# Altium PCB terminate-logic.PcbDoc
Units mil, origin at the board's own origin, x right, y up, seen from the top; angles counter-clockwise.
Board outline 650 x 1325 mil, 2 copper layers (Top Layer, Bottom Layer), stack 47.8 mil thick; 9 components, 5 nets, 36 pads, 0 vias.
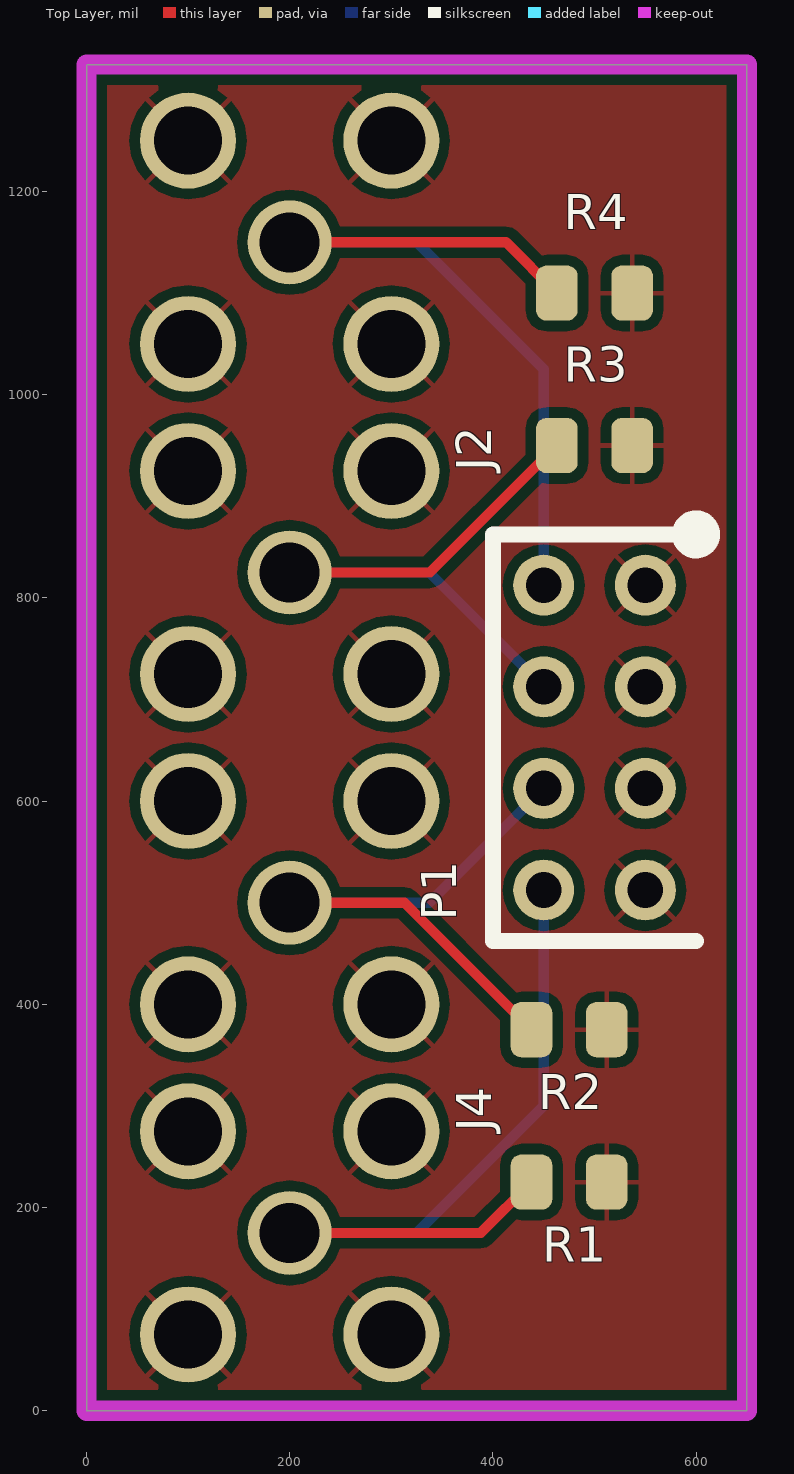
[diagram p0: Top Layer view]
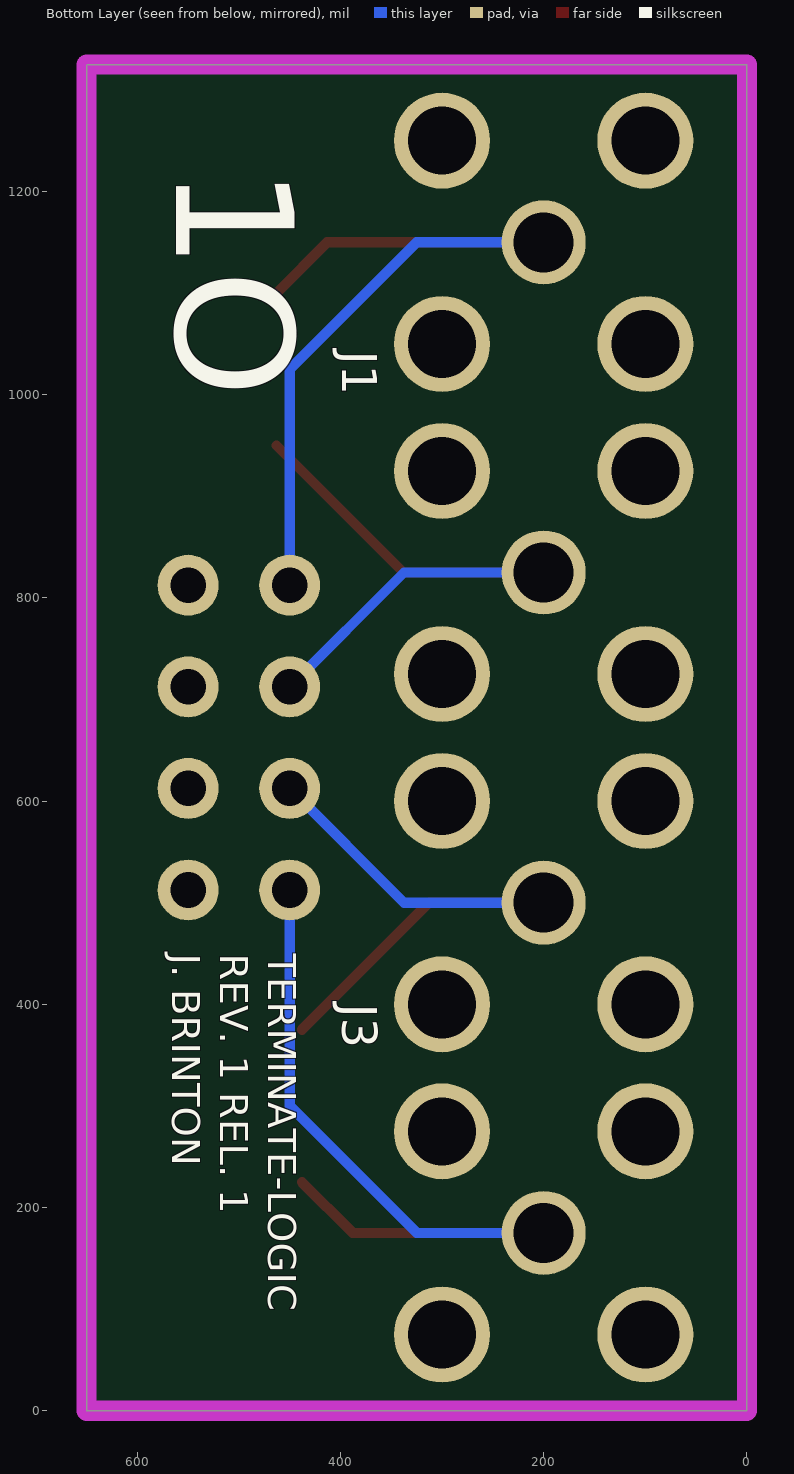
[diagram p1: Bottom Layer view, seen from below]
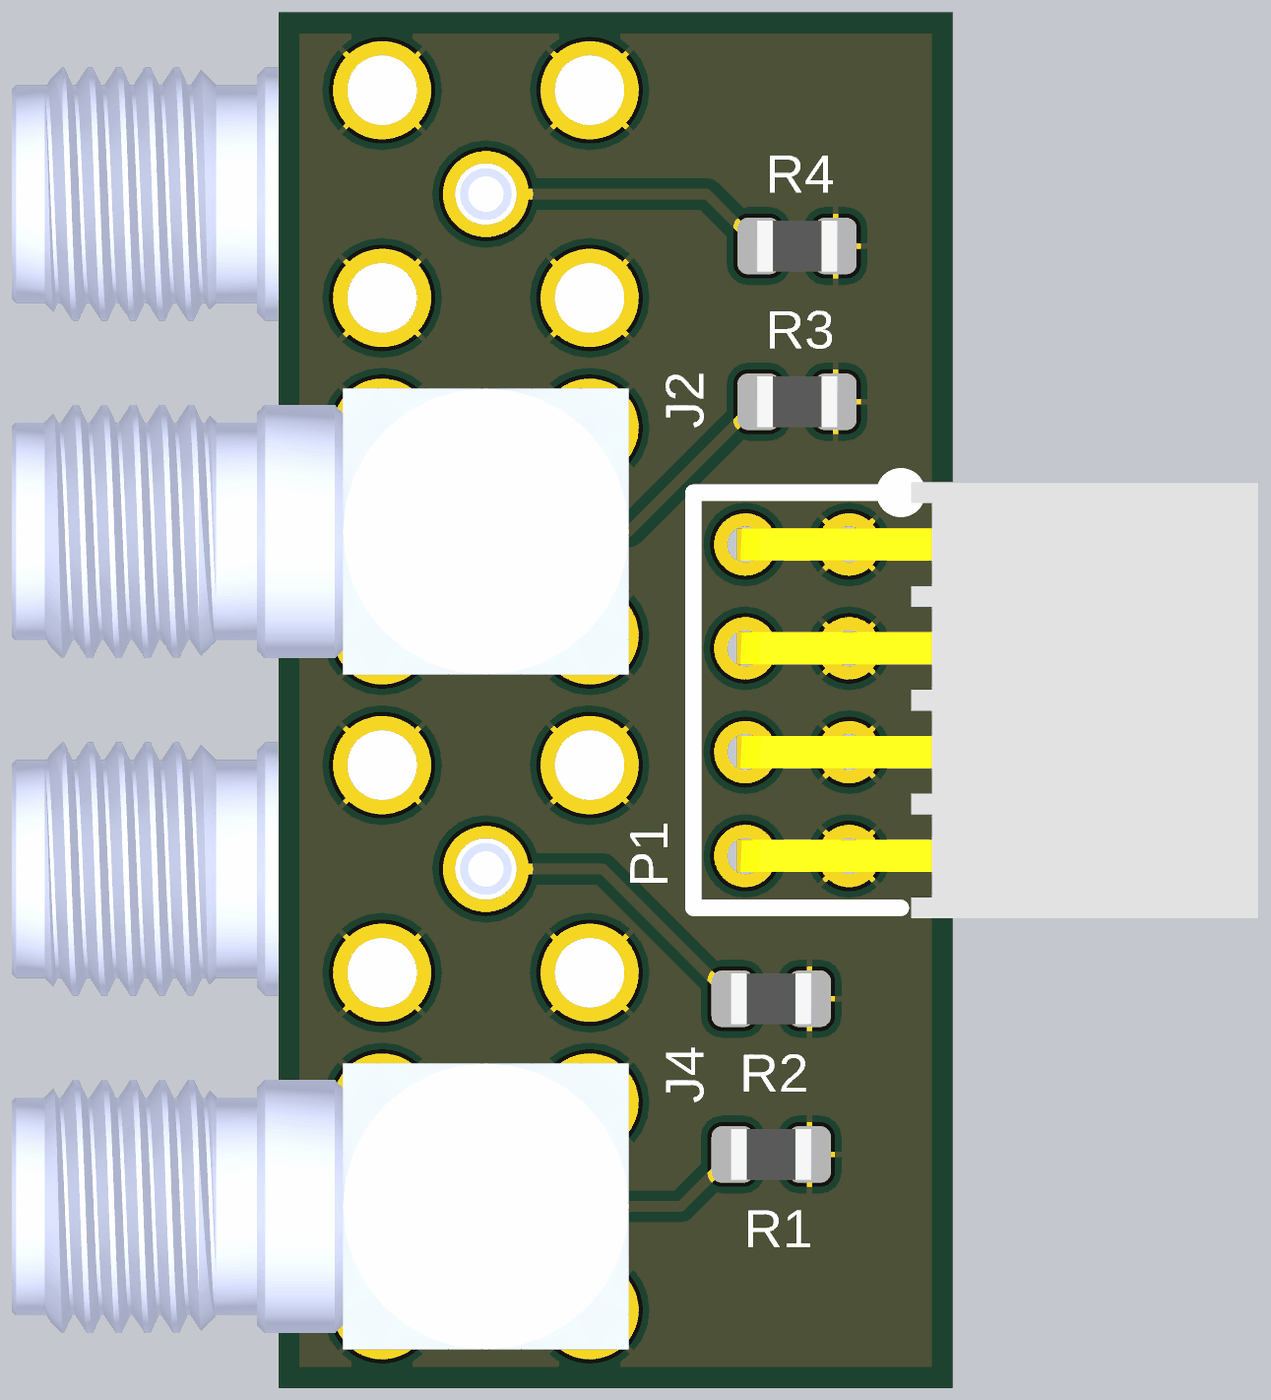
[diagram p2: 3D render of the assembled board from above, using the file's embedded part models]

## Layer stack, top to bottom
Top Solder: solder mask 0.4, Solder Resist, Dk 3.5
Top Layer: signal copper 1.4
Dielectric1: core 45, FR-4, Dk 4.8
Bottom Layer: signal copper 1.4
Bottom Solder: solder mask 0.4, Solder Resist, Dk 3.5

## Board outline
0,0 650,0 650,1325 0,1325

## Design rules (kind name [scope] priority, off if disabled: settings)
Clearance [All] p1: gap=10 ignorepadtopadclearanceinfootprint=FALSE
ComponentClearance [All] p1 off: gap=10 collisioncheckmode=3 verticalgap=10 showdistances=FALSE
HoleSize [All] p1: absolutevalues=TRUE maxlimit=1000 minlimit=10 maxpercent=80.000 minpercent=20.000
PolygonConnect [All] p1: thpad.connectstyle=Relief thpad.reliefconductorwidth=5 thpad.reliefentries=4 thpad.polygonreliefangle="45 Angle" thpad.airgapwidth=10 smdpad.connectstyle=Relief smdpad.reliefconductorwidth=5 smdpad.reliefentries=4 smdpad.polygonreliefangle="90 Angle" smdpad.airgapwidth=10 via.connectstyle=Direct via.reliefconductorwidth=10 via.reliefentries=4 via.polygonreliefangle="90 Angle" via.airgapwidth=10
RoutingVias [All] p1: holewidth=28 width=50 viastyle="Through Hole" minholewidth=28 minwidth=50 maxholewidth=28 maxwidth=50
SilkToSolderMaskClearance SilkscreenOverComponentPads [IsPad] p1: minsilkscreentomaskgap=10 clearancetoexposedcopper=TRUE
SolderMaskExpansion [All] p1: expansion=4
Width [All] p1: maxlimit=19685.04 minlimit=10 preferedwidth=10
27 further rules are at their usual default settings.

## Components (designator, comment, footprint, x,y, rotation, side; value= is the part's Value field where it differs from the comment)
J1 "132136" 132136 200,1150 r0 bottom
J2 "132136" 132136 200,825 r0 top
J3 "132136" 132136 200,500 r0 bottom
J4 "132136" 132136 200,175 r0 top
P1 "SSW-104-02-T-D-RA" SSW-104-02-T-D-RA 500,662.5 r270 top
R1 "ERJ-6ENF49R9V" RESC2012X70N 475,225 r0 top value=49.9
R2 "ERJ-6ENF49R9V" RESC2012X70N 475,375 r0 top value=49.9
R3 "ERJ-6ENF49R9V" RESC2012X70N 500,950 r0 top value=49.9
R4 "ERJ-6ENF49R9V" RESC2012X70N 500,1100 r0 top value=49.9

## Footprints (in the part's own frame and the unit in brackets; to place one, negate y for a bottom-side part, rotate by r counter-clockwise, add the part's x,y. Pads: shape width x height; smd on the part's side, far side on the other; paste and mask are expansions set on the pad)
132136 [mm] "SMA R/A Connector"
  round 2.1 hole 1.5: 1(0,0)
  round 2.4 hole 1.7: 2(2.54,-2.54) 3(2.54,2.54) 4(-2.54,2.54) 5(-2.54,-2.54)
  body extent -11.6,-3.5 3.5,3.5, height 9.86
RESC2012X70N [mm] "Resistor, Chip; 2.00 mm L X 1.25 mm W X 0.70 mm H body"
  rrect50% 1.04x1.38 smd: 1(-0.94,0) 2(0.94,0)
  body extent -1,-0.63 1,0.63, height 0.7
SSW-104-02-T-D-RA [mil] "Through Hole Right Angle 0.1\"-Pitch Header Receptacle"
  round 60 hole 35: 1(-150,50) 2(-150,-50) 3(-50,50) 4(-50,-50) 5(50,50) 6(50,-50) 7(150,50) 8(150,-50)
  silkscreen extent -212,-100 200,112, body extent -210,-58 210,445, height 195

## Part data
J1 J2 J3 J4: "SMA Right Angle Connector COAX Female", Manufacturer=Amphenol, Manufacturer P/N=132136
P1: "Through Hole Right Angle 0.1\"-Pitch Header Receptacle", Manufacturer=Samtec, Manufacturer P/N=SSW-104-02-T-D-RA
R1 R2 R3 R4: library part "RES 0402", "Thick Film Resistor 49.9 ±1% 0805", Manufacturer=Panasonic, Package=0805, Tolerance=±1%, Alternate="any same value component", Manufacturer P/N=ERJ-6ENF49R9V, Tr=-55:155

## Nets (pads, with @x,y where several pads share a name; then routed paths per layer and width w, separated by ;. In a path a pad name is that pad's centre, name@x,y a point inside that pad or via, vN(x,y) a via of type N, cw(c..) or ccw(c..) an arc to the next point about the centre after c; other vN are vias at no path point)
GND: J1.2 J1.3 J1.4 J1.5 J2.2 J2.3 J2.4 J2.5 J3.2 J3.3 J3.4 J3.5 J4.2 J4.3 J4.4 J4.5 P1.1 P1.3 P1.5 P1.7 R1.2 R2.2 R3.2 R4.2
NetJ1_1: J1.1 P1.2 R4.1 | length 798
  Top Layer w10: J1.1 412.99,1150 R4.1
  Bottom Layer w10: J1.1 325,1150 450,1025 P1.2
NetJ2_1: J2.1 P1.4 R3.1 | length 611.4
  Top Layer w10: J2.1 337.99,825 R3.1
  Bottom Layer w10: J2.1 337.5,825 P1.4
NetJ3_1: J3.1 P1.6 R2.1 | length 586.4
  Top Layer w10: J3.1 312.99,500 R2.1
  Bottom Layer w10: J3.1 337.5,500 P1.6
NetJ4_1: J4.1 P1.8 R1.1 | length 773
  Top Layer w10: J4.1 387.99,175 R1.1
  Bottom Layer w10: J4.1 325,175 450,300 P1.8

## Polygon pours and split planes (outlines as drawn)
GND on Top Layer "TOP_GND" (solid, pour order 0): 0,0 650,0 650,1325 0,1325

## Keep-outs
Keep-Out Layer:
  the board outline again, w20

## Silkscreen, mask and mechanical layers (free items; w line width, h text height)
Bottom Overlay:
  text "1O" at 600,1225 h200 r90
  text "TERMINATE-LOGIC / REV. 1 REL. 1 / J. BRINTON" at 575,450 h47.24 r90
Mechanical 2:
  the board outline again, w5
Mechanical 10:
  text "1. FRONT ASSEMBLY NOTE #1" at 2075,5300 h45
Mechanical 11:
  text "1. FRONT CONFORMAL COAT NOTE #1" at 2075,5225 h45
Mechanical 16:
  lines w5: -2283.46,-119.09 -2083.46,-119.09 ; -2283.46,2005.91 -2083.46,2005.91 ; -2283.46,4130.91 -2083.46,4130.91 ; 466.54,-2244.09 466.54,-2044.09 ; 466.54,6055.91 466.54,6255.91 ; 1216.54,-2044.09 1216.54,-844.09 2616.54,-844.09 ; 1216.54,-1204.09 2616.54,-1204.09 ; 1266.54,-1334.09 1666.54,-1334.09 ; 1481.54,-1614.09 1511.54,-1614.09 ; 1481.54,-1589.09 1511.54,-1589.09 ; 1481.54,-1514.09 1511.54,-1514.09 ; 1481.54,-1489.09 1511.54,-1489.09 ; 1481.54,-1414.09 1511.54,-1414.09 ; 1481.54,-1389.09 1511.54,-1389.09 ; 3216.54,-2244.09 3216.54,-2044.09 ; 3216.54,6055.91 3216.54,6255.91 ; 4016.54,-1744.09 8516.54,-1744.09 ; 4016.54,-1444.09 8516.54,-1444.09 ; 4016.54,-1144.09 5516.54,-1144.09 ; 4016.54,5655.91 8516.54,5655.91 ; 4016.54,5855.91 8516.54,5855.91 ; 4016.54,6055.91 4016.54,5455.91 8516.54,5455.91 ; 4616.54,5455.91 4616.54,6055.91 ; 5116.54,5455.91 5116.54,6055.91 ; 5516.54,-2044.09 5516.54,-1444.09 5516.54,-844.09 ; 5966.54,-2244.09 5966.54,-2044.09 ; 5966.54,6055.91 5966.54,6255.91 ; 7616.54,-2044.09 7616.54,-1444.09 ; 7891.54,5455.91 7891.54,6055.91 ; 8516.54,-119.09 8716.54,-119.09 ; 8516.54,2005.91 8716.54,2005.91 ; 8516.54,4130.91 8716.54,4130.91 ; 2616.54,-844.09 4016.54,-844.09 ; 2616.54,-844.09 2616.54,-2044.09 4016.54,-2044.09 ; 4016.54,-2044.09 8516.54,-2044.09 ; 4016.54,-2044.09 4016.54,-844.09 ; 4016.54,-844.09 5516.54,-844.09 ; 5516.54,-844.09 8516.54,-844.09 8516.54,-2044.09 ; 8516.54,-2044.09 -2083.46,-2044.09 -2083.46,6055.91 8516.54,6055.91 8516.54,-2044.09 ; -2283.46,-2244.09 8716.54,-2244.09 8716.54,6255.91 -2283.46,6255.91 -2283.46,-2244.09
  lines w7: 1496.54,-1604.09 1496.54,-1574.09 ; 1496.54,-1504.09 1496.54,-1474.09 ; 1496.54,-1404.09 1496.54,-1374.09
  text "1" at -932.13,6120.91 h70
  text "2" at 1818.54,6120.91 h70
  text "3" at 4563.54,6120.91 h70
  text "4" at 7314.55,6120.91 h70
  text "REV" at 4066.54,5905.91 h66.93
  text "DATE" at 4666.54,5905.91 h66.93
  text "DESC" at 5166.54,5905.91 h66.93
  text "ENG" at 7966.54,5905.91 h66.93
  text "1" at 4066.54,5705.91 h66.93
  text "[MM/DD/YY]" at 4666.54,5705.91 h66.93
  text "INITIAL RELEASE" at 5166.54,5705.91 h66.93
  text "[J. DOE]" at 7966.54,5705.91 h66.93
  text "A" at -2208.46,5102.91 h70
  text "A" at 8591.54,5102.91 h70
  text "B" at -2208.46,2977.91 h70
  text "B" at 8591.54,2977.91 h70
  text "C" at -2208.46,852.91 h70
  text "C" at 8591.54,852.91 h70
  text "ENGINEER:" at 4066.54,-944.09 h45
  text "TITLE:" at 5566.54,-944.09 h45
  text ".Client" at 2716.54,-1015 h100
  text "ALL DIMENSIONS ARE IN MM (INCHES)" at 1291.54,-1019.09 h47.24
  text "[J. Doe]" at 4066.54,-1069.09 h70
  text ".ClientAddress" at 2716.54,-1115 h100
  text "TOLERANCES:" at 1726.54,-1184.09 h47.24
  text ".ClientProject" at 5591.54,-1219.09 h86.61
  text "PCB DESIGNER:" at 4066.54,-1239.09 h45
  text "D" at -2208.46,-1267.09 h70
  text "D" at 8591.54,-1267.09 h70
  text "DECIMALS" at 1291.54,-1294.09 h47.24
  text "[J. Doe]" at 4066.54,-1369.09 h70
  text ".X     0.1" at 1291.54,-1419.09 h47.24
  text ".XX    0.05" at 1291.54,-1519.09 h47.24
  text "DATE:" at 4066.54,-1544.09 h45
  text "PART NO.:" at 5566.54,-1544.09 h45
  text "REV:" at 7666.54,-1544.09 h45
  text ".XXX   0.005" at 1291.54,-1619.09 h47.24
  text "Designed By:" at 2716.54,-1619.09 h100
  text "[MM/DD/YYYY]" at 4066.54,-1669.09 h66.93
  text "-" at 5566.54,-1669.09 h70
  text "1" at 7666.54,-1669.09 h70
  text ".Company" at 2916.54,-1719.09 h100
  text ".CompanyAddress" at 2916.54,-1819.09 h100
  text "*UNLESS OTHERWISE NOTED" at 1266.54,-1844.09 h47.24
  text "FILE NAME:" at 4066.54,-1844.09 h45
  text "DWG NO:" at 5566.54,-1844.09 h45
  text "SCALE:" at 7666.54,-1844.09 h45
  text ".CompanyEmail" at 2916.54,-1919.09 h100
  text ".PCB_FILE_NAME_NO_PATH" at 2316.54,-1964.09 h70
  text ".PCB_FILE_NAME_NO_PATH" at 4116.54,-1964.09 h70
  text "-" at 5566.54,-1969.09 h70
  text "1:1" at 7666.54,-1969.09 h70
  text "1" at -932.13,-2179.09 h70
  text "2" at 1818.54,-2179.09 h70
  text "3" at 4563.54,-2179.09 h70
  text "4" at 7314.55,-2179.09 h70
Drill Drawing:
  text "1. LEAD-FREE HASL" at 2086.61,5228.74 h45
  text "2. SOLDERMASK: GREEN" at 2086.61,5128.74 h45
  text "3. SILKSCREEN: WHITE" at 2086.61,5028.74 h45
  text "4. NO BOTTOM SOLDERMASK" at 2086.61,4928.74 h45
  text ".Legend" at 4025,4400 h47.24
Mechanical 26:
  text "1. BOTTOM ASSEMBLY NOTE #1" at 4000,5300 h45
Mechanical 27:
  text "1. BOTTOM CONFORMAL COAT NOTE #1" at 4000,5225 h45
Mechanical 32:
  lines w5: -2283.46,-119.09 -2083.46,-119.09 ; -2283.46,2005.91 -2083.46,2005.91 ; -2283.46,4130.91 -2083.46,4130.91 ; -2083.46,-1744.09 2416.54,-1744.09 ; -2083.46,-1444.09 2416.54,-1444.09 ; -2083.46,5455.91 2416.54,5455.91 2416.54,6055.91 ; -2083.46,5655.91 2416.54,5655.91 ; -2083.46,5855.91 2416.54,5855.91 ; -1458.46,5455.91 -1458.46,6055.91 ; -1183.46,-2044.09 -1183.46,-1444.09 ; 466.54,-2244.09 466.54,-2044.09 ; 466.54,6055.91 466.54,6255.91 ; 916.54,-2044.09 916.54,-1444.09 916.54,-844.09 ; 916.54,-1144.09 2416.54,-1144.09 ; 1316.54,5455.91 1316.54,6055.91 ; 1816.54,5455.91 1816.54,6055.91 ; 3216.54,-2244.09 3216.54,-2044.09 ; 3216.54,6055.91 3216.54,6255.91 ; 3816.54,-1204.09 5216.54,-1204.09 ; 4766.54,-1334.09 5166.54,-1334.09 ; 4921.54,-1614.09 4951.54,-1614.09 ; 4921.54,-1589.09 4951.54,-1589.09 ; 4921.54,-1514.09 4951.54,-1514.09 ; 4921.54,-1489.09 4951.54,-1489.09 ; 4921.54,-1414.09 4951.54,-1414.09 ; 4921.54,-1389.09 4951.54,-1389.09 ; 5216.54,-2044.09 5216.54,-844.09 3816.54,-844.09 ; 5966.54,-2244.09 5966.54,-2044.09 ; 5966.54,6055.91 5966.54,6255.91 ; 8516.54,-119.09 8716.54,-119.09 ; 8516.54,2005.91 8716.54,2005.91 ; 8516.54,4130.91 8716.54,4130.91 ; -2083.46,-2044.09 2416.54,-2044.09 ; -2083.46,-2044.09 -2083.46,-844.09 916.54,-844.09 ; -2083.46,-2044.09 8516.54,-2044.09 8516.54,6055.91 -2083.46,6055.91 -2083.46,-2044.09 ; 916.54,-844.09 2416.54,-844.09 ; 2416.54,-2044.09 3816.54,-2044.09 3816.54,-844.09 ; 2416.54,-2044.09 2416.54,-844.09 ; 2416.54,-844.09 3816.54,-844.09 ; -2283.46,-2244.09 8716.54,-2244.09 8716.54,6255.91 -2283.46,6255.91 -2283.46,-2244.09
  lines w7: 4936.54,-1604.09 4936.54,-1574.09 ; 4936.54,-1504.09 4936.54,-1474.09 ; 4936.54,-1404.09 4936.54,-1374.09
  text "4" at -881.48,6120.91 h70
  text "3" at 1869.54,6120.91 h70
  text "2" at 4614.54,6120.91 h70
  text "1" at 7365.2,6120.91 h70
  text "ENG" at -1533.46,5905.91 h66.93
  text "DESC" at 1266.54,5905.91 h66.93
  text "DATE" at 1766.54,5905.91 h66.93
  text "REV" at 2366.54,5905.91 h66.93
  text "[J. DOE]" at -1533.46,5705.91 h66.93
  text "INITIAL RELEASE" at 1266.54,5705.91 h66.93
  text "[MM/DD/YY]" at 1766.54,5705.91 h66.93
  text "1" at 2366.54,5705.91 h66.93
  text "A" at -2158.46,5102.91 h70
  text "A" at 8641.54,5102.91 h70
  text "B" at -2158.46,2977.91 h70
  text "B" at 8641.54,2977.91 h70
  text "C" at -2158.46,852.91 h70
  text "C" at 8641.54,852.91 h70
  text "TITLE:" at 866.54,-944.09 h45
  text "ENGINEER:" at 2366.54,-944.09 h45
  text ".Client" at 3716.54,-1015 h100
  text "ALL DIMENSIONS ARE IN MM (INCHES)" at 5141.54,-1019.09 h47.24
  text "[J. Doe]" at 2366.54,-1069.09 h70
  text ".ClientAddress" at 3716.54,-1115 h100
  text "TOLERANCES:" at 4706.54,-1184.09 h47.24
  text ".ClientProject" at 841.54,-1219.09 h86.61
  text "PCB DESIGNER:" at 2366.54,-1239.09 h45
  text "D" at -2158.46,-1267.09 h70
  text "D" at 8641.54,-1267.09 h70
  text "DECIMALS" at 5141.54,-1294.09 h47.24
  text "[J. Doe]" at 2366.54,-1369.09 h70
  text ".X     0.1" at 5141.54,-1419.09 h47.24
  text ".XX    0.05" at 5141.54,-1519.09 h47.24
  text "REV:" at -1233.46,-1544.09 h45
  text "PART NO.:" at 866.54,-1544.09 h45
  text "DATE:" at 2366.54,-1544.09 h45
  text "Designed By:" at 3716.54,-1619.09 h100
  text ".XXX   0.005" at 5141.54,-1619.09 h47.24
  text "1" at -1233.46,-1669.09 h70
  text "-" at 866.54,-1669.09 h70
  text "[MM/DD/YYYY]" at 2366.54,-1669.09 h66.93
  text ".Company" at 3516.54,-1719.09 h100
  text ".CompanyAddress" at 3516.54,-1819.09 h100
  text "SCALE:" at -1233.46,-1844.09 h45
  text "DWG NO:" at 866.54,-1844.09 h45
  text "FILE NAME:" at 2366.54,-1844.09 h45
  text "*UNLESS OTHERWISE NOTED" at 5166.54,-1844.09 h47.24
  text ".CompanyEmail" at 3516.54,-1919.09 h100
  text ".PCB_FILE_NAME_NO_PATH" at 2316.54,-1964.09 h70
  text "1:1" at -1233.46,-1969.09 h70
  text "-" at 866.54,-1969.09 h70
  text "4" at -881.48,-2179.09 h70
  text "3" at 1869.54,-2179.09 h70
  text "2" at 4614.54,-2179.09 h70
  text "1" at 7365.2,-2179.09 h70